# Altium PCB DummyLoadAddOn.PcbDoc
Units mil, origin at the board's own origin, x right, y up, seen from the top; angles counter-clockwise.
Board outline 2875 x 2200 mil, 4 copper layers (Top Layer, Layer2, Layer3, Bottom Layer), stack 64.6 mil thick; 31 components, 29 nets, 127 pads, 154 vias.
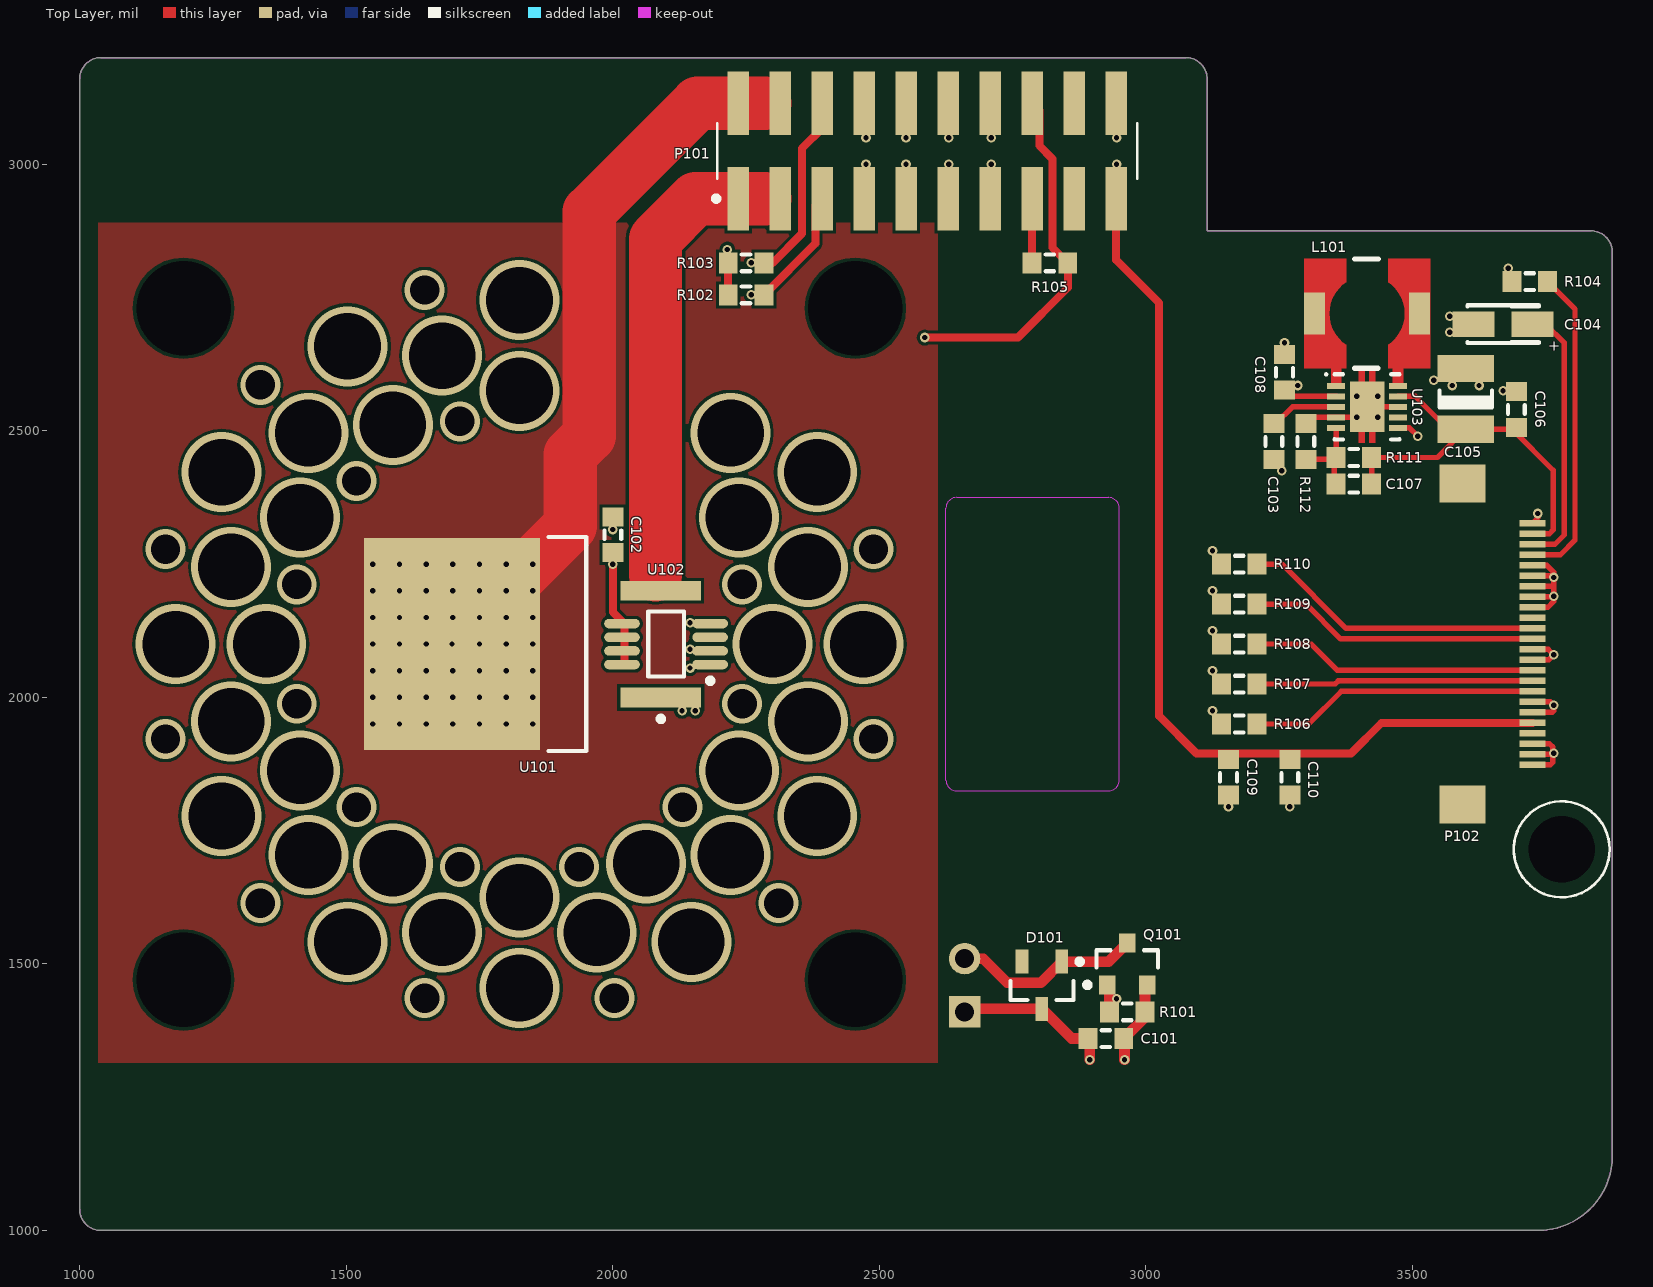
[diagram p0: Top Layer view]
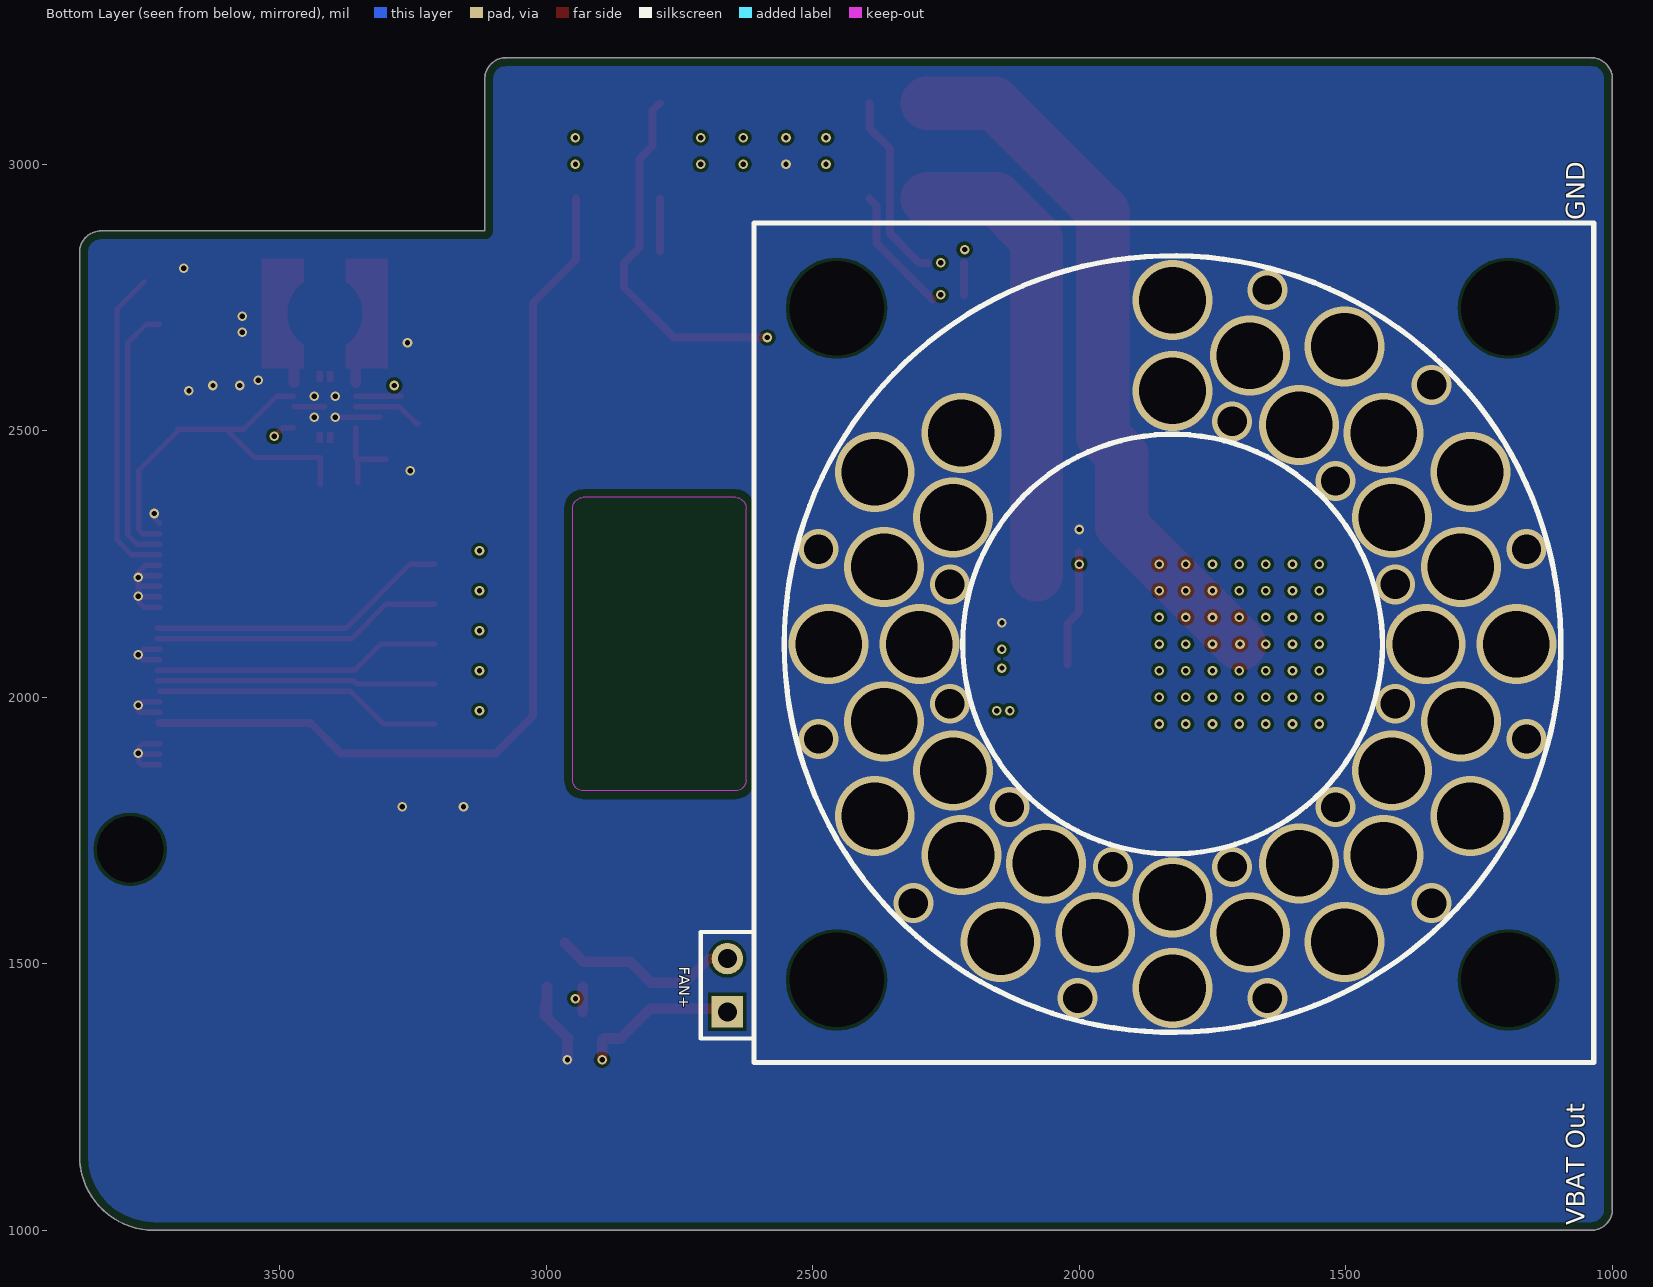
[diagram p1: Bottom Layer view, seen from below]
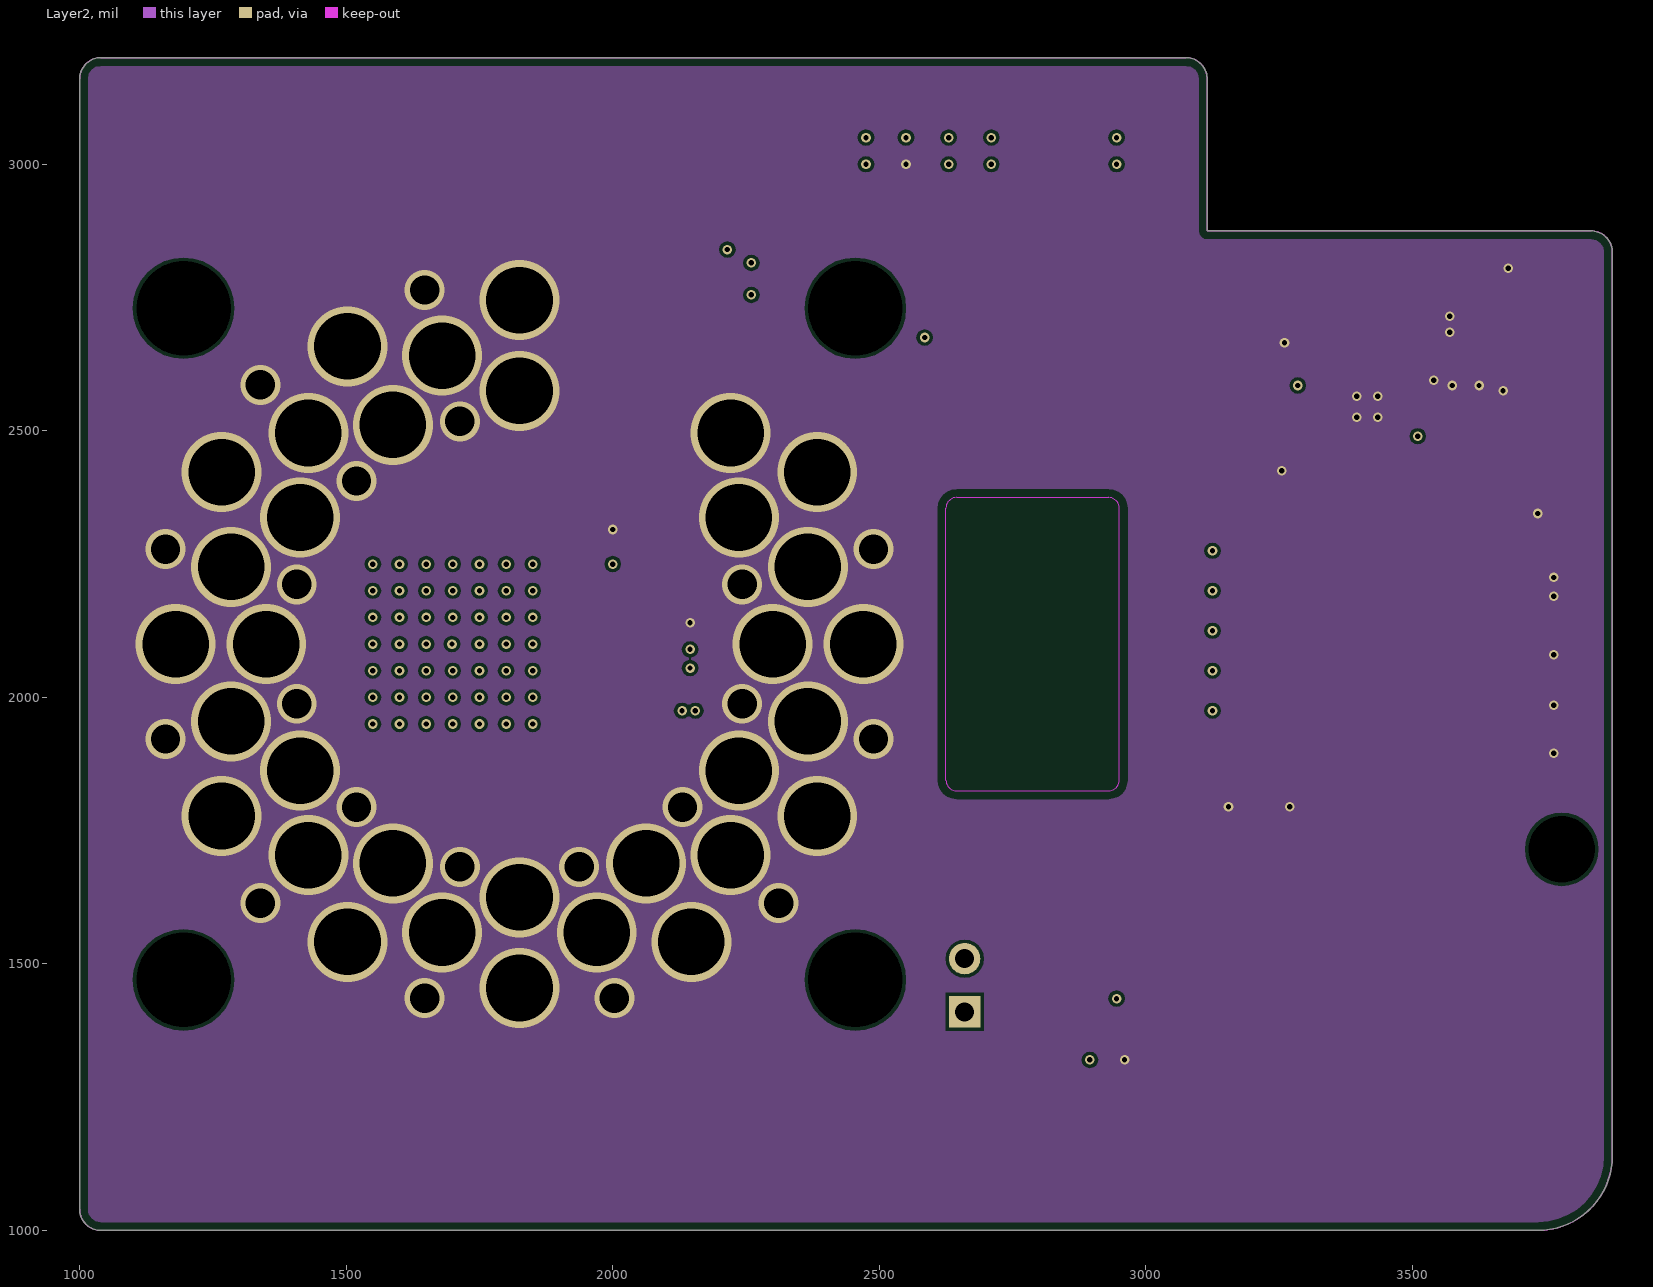
[diagram p2: Layer2]
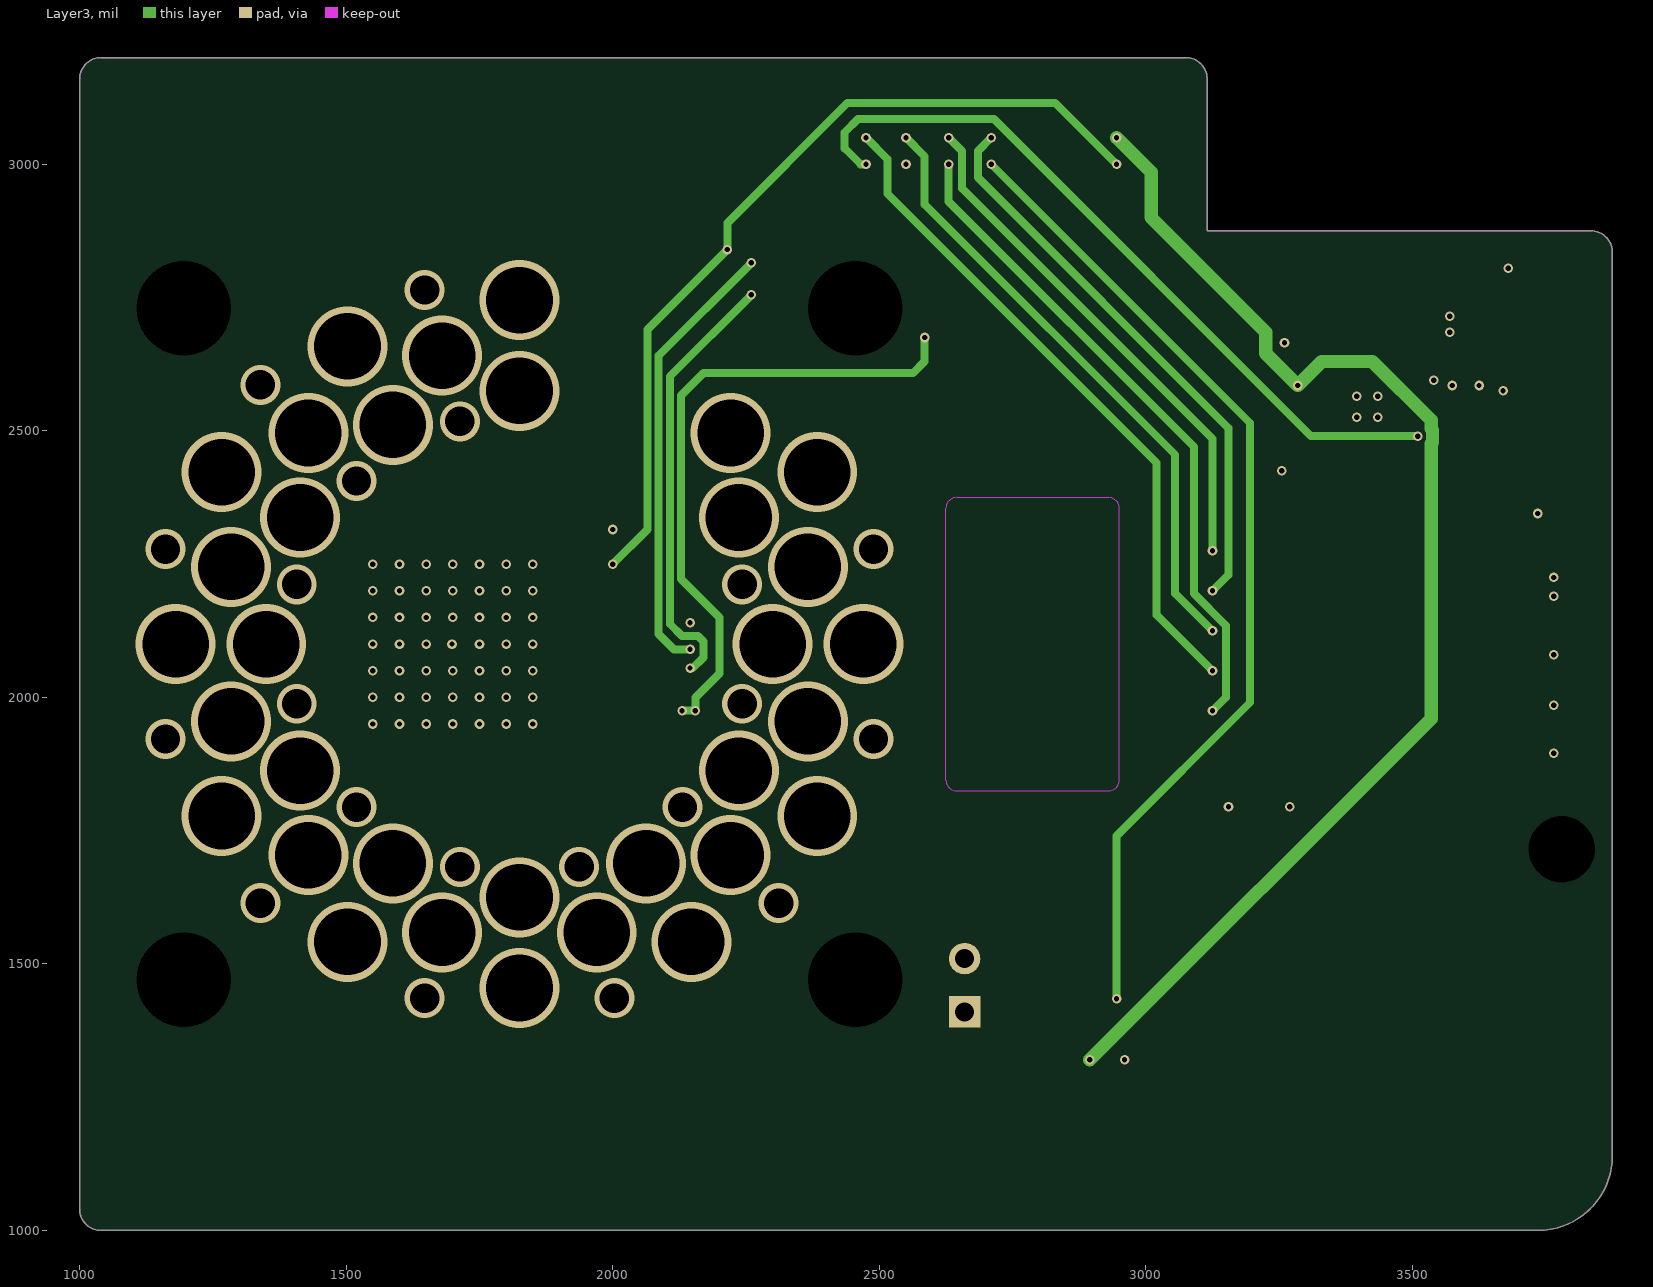
[diagram p3: Layer3]

## Layer stack, top to bottom
Top Solder: solder mask 0.4, Solder Resist, Dk 3.5
Top Layer: signal copper 1.4
Dielectric 1: core 6.7, FR-4, Dk 3.66
Layer2: signal copper 0.7
Dielectric 3: prepreg 47, Dk 3.66
Layer3: signal copper 0.7
Dielectric 2: core 6.7, Dk 3.66
Bottom Layer: signal copper 1.4
Bottom Solder: solder mask 0.4, Solder Resist, Dk 3.5

## Board outline
1000,1040 ccw(c1040,1040) 1040,1000 3735,1000 ccw(c3735,1140) 3875,1140 3875,2835 ccw(c3835,2835) 3835,2875 3115,2875 3115,3160 ccw(c3075,3160) 3075,3200 1040,3200 ccw(c1040,3160) 1000,3160

## Design rules (kind name [scope] priority, off if disabled: settings)
Clearance Clearance_1 [OnLayer('Keep-Out Layer')] p1: gap=15
Clearance [All] p2: gap=6
HoleSize [All] p1: absolutevalues=TRUE maxlimit=180 minlimit=10 maxpercent=80.000 minpercent=20.000
MinimumSolderMaskSliver [All] p1: minsoldermaskwidth=5.7
PasteMaskExpansion [All] p1: expansion=-1
PlaneConnect [All] p1: planeconnectstyle=Direct reliefexpansion=20 reliefentries=4 reliefconductorwidth=10 reliefairgap=10
PolygonConnect [All] p1: connectstyle=Direct reliefconductorwidth=10 reliefentries=4 polygonreliefangle="90 Angle" airgapwidth=10
RoomDefinition DummyLoadAddOn [InComponentClass('DummyLoadAddOn')] p1: confinementstyle=ConfineIn formatcopy=TRUE lockcomponents=FALSE outline 1000,1010 3890,1010 3890,3215 1000,3215
RoutingVias [All] p1: holewidth=13 width=18 viastyle="Through Hole" minholewidth=10 minwidth=18 maxholewidth=28 maxwidth=50
SilkToSolderMaskClearance [IsPad] p1: minsilkscreentomaskgap=2.8 clearancetoexposedcopper=TRUE
SolderMaskExpansion [All] p1: expansion=1
Width [All] p1: maxlimit=300 minlimit=6 preferedwidth=10
25 further rules are at their usual default settings.

## Components (designator, comment, footprint, x,y, rotation, side; value= is the part's Value field where it differs from the comment)
C101 "1608" RESC1608N 2925,1360 r180 top
C102 "1608" RESC1608N 2000,2305 r270 top
C103 "1608" RESC1608N 3240,2480 r90 top
C104 "T491A475K025AT" A_3216 3670,2700 r0 top
C105 "TMK325B7106KN-TR" CAPC3225N 3600,2560 r90 top
C106 "1608" RESC1608N 3695,2540 r270 top
C107 "1608" RESC1608N 3390,2400 r0 top
C108 "1608" RESC1608N 3260,2610 r270 top
C109 "1608" RESC1608N 3155,1850 r270 top
C110 "1608" RESC1608N 3270,1850 r270 top
D101 "Diode BAS16" SOT-23_N 2805,1460 r270 top
FAN+ "Header 2" HDR1X2 2660,1410 r90 bottom
L101 "Inductor" SRR4018 3415,2720 r90 top
P101 "TW-10-03-F-D-310-SM" "Samtec TW-SM 20-pin" 2590,3025 r90 top
P102 "FH12A-24S-0.5SH(55)" "MI050DXK-24-1 - duplicate" 3725,2100 r270 top
Q101 "NTR4501NT1G" ONSC-SOT-23-3-318-08_V 2965,1500 r90 top
R101 "1608" RESC1608N 2965,1410 r180 top
R102 "1608" RESC1608N 2250,2755 r180 top
R103 "1608" RESC1608N 2250,2815 r180 top
R104 "1608" RESC1608N 3720,2780 r180 top
R105 "1608" RESC1608N 2820,2815 r180 top
R106 "1608" RESC1608N 3175,1950 r180 top
R107 "1608" RESC1608N 3175,2025 r180 top
R108 "1608" RESC1608N 3175,2100 r180 top
R109 "1608" RESC1608N 3175,2175 r180 top
R110 "1608" RESC1608N 3175,2250 r180 top
R111 "1608" RESC1608N 3390,2450 r180 top
R112 "1608" RESC1608N 3300,2480 r90 top
U101 "BTS117TC" INF-PG-TO263-3-2_N 1850,2100 r180 top
U102 "LM75BDP" MUA08A_N 2100,2100 r180 top
U103 "TPS61080DRCR" TI-DRC10-2400X1650TP_V 3415,2545 r0 top

## Footprints (in the part's own frame and the unit in brackets; to place one, negate y for a bottom-side part, rotate by r counter-clockwise, add the part's x,y. Pads: shape width x height; smd on the part's side, far side on the other; paste and mask are expansions set on the pad)
A_3216 [mm] "Capacitor, SM Tantalum; Body 3.2 x 1.6 mm (LxW typ)"
  rect 2x1.2 smd: 1(1.4,0) 2(-1.4,0)
  silkscreen extent -1.7,-0.9 1.7,0.9, body extent -1.88,-1 1.88,1, height 1.9
CAPC3225N [mm] "Chip Capacitor, Body 3.2x2.5mm, IPC Medium Density"
  rect 1.3x2.7 smd: 1(-1.45,0) 2(1.45,0)
  silkscreen extent -0.4,-1.25 0.4,1.25, body extent -1.7,-1.35 1.7,1.35, height 1.35
HDR1X2 [mm] "Connector; Header; 2 Position"
  rect 1.5x1.5 hole 0.9: 1(0,0)
  round 1.5 hole 0.9: 2(2.54,0)
  silkscreen extent -1.27,-1.27 3.81,1.27
INF-PG-TO263-3-2_N [mm] "DPAK, 3-Leads, Body 10x9.25mm, Pitch 2.54mm, IPC Medium Density"
  rect 3.85x0.95 smd: 1(-6.1,2.54) 3(-6.1,-2.54)
  rect 8.4x10.1 smd: 2(3.85,0)
  silkscreen extent -6.23,-5.1 -0.75,5.1, body extent -2.55,-5.1 6.9,5.1, height 4.4
"MI050DXK-24-1 - duplicate" [mm] "24 pos FPC contact"
  rect 0.3x1.25 smd: 1(5.75,0) 2(5.25,0) 3(4.75,0) 4(4.25,0) 5(3.75,0) 6(3.25,0) 7(2.75,0) 8(2.25,0) 9(1.75,0) 10(1.25,0) 11(0.75,0) 12(0.25,0) 13(-0.25,0) 14(-0.75,0) 15(-1.25,0) 16(-1.75,0) 17(-2.25,0) 18(-2.75,0) 19(-3.25,0) 20(-3.75,0) 21(-4.25,0) 22(-4.75,0) 23(-5.25,0) 24(-5.75,0)
  rect 1.8x2.2 smd: MP1(7.65,-3.325) MP2(-7.65,-3.325)
MUA08A_N [mm] "TSOP, 8-Leads, Body 3x3mm, Pitch 0.65mm, IPC Medium Density"
  oval 1.7x0.45 smd: 1(-2.1,0.975) 2(-2.1,0.325) 3(-2.1,-0.325) 4(-2.1,-0.975) 5(2.1,-0.975) 6(2.1,-0.325) 7(2.1,0.325) 8(2.1,0.975)
  silkscreen extent -2.22,-1.55 0.85,1.87, body extent -1.55,-1.55 1.55,1.55, height 1.09
ONSC-SOT-23-3-318-08_V [mm] "SOT23, 3-Leads, Body 2.92x1.3mm, Pitch 0.95mm"
  rect 0.9x0.8 smd: 1(-1,0.95) 2(-1,-0.95) 3(1,0)
  silkscreen extent -1.12,-1.46 0.65,2.02, body extent -0.65,-1.46 0.65,1.46, height 1.11
RESC1608N [mm] "Chip Resistor, Body 1.6x0.8mm, IPC Medium Density"
  rect 0.9x1 smd: 1(-0.85,0) 2(0.85,0)
  silkscreen extent -0.2,-0.4 0.2,0.4, body extent -0.85,-0.48 0.85,0.48, height 0.6
"Samtec TW-SM 20-pin" [mm]
  rect 3.025x1.02 smd: 1(-2.272,9) 2(2.272,9) 3(-2.272,7) 4(2.272,7) 5(-2.272,5) 6(2.272,5) 7(-2.272,3) 8(2.272,3) 9(-2.272,1) 10(2.272,1) 11(-2.272,-1) 12(2.272,-1) 13(-2.272,-3) 14(2.272,-3) 15(-2.272,-5) 16(2.272,-5) 17(-2.272,-7) 18(2.272,-7) 19(-2.272,-9) 20(2.272,-9)
  silkscreen extent -2.4,-10 1.33,10.18, body extent -3.37,-10 3.37,10, height 11.89
SOT-23_N [mm] "SOT23, 3-Leads, Body 2.9x1.3mm, Pitch 0.95mm, Lead Span 2.5mm, IPC Medium Density"
  rect 1.15x0.6 smd: 1(-1.125,0.95) 2(-1.125,-0.95) 3(1.125,0)
  silkscreen extent -1.25,-1.5 0.7,1.93, body extent -0.7,-1.5 0.7,1.5, height 1.1
SRR4018 [mm] "Shielded SMD Power Inductors"
  rect 2x1 smd: 1(0,2.5) 2(0,-2.5)
  Top Layer region: 2.6,-1 2.6,-3 -2.6,-3 -2.6,-1 -1.5,-1 -1.498,-0.998 -0.849,-1.587 0,-1.8 0.849,-1.587 1.498,-0.998 1.498,-0.998 1.5,-1
  Top Layer region: -2.6,1 -2.6,3 2.6,3 2.6,1 1.5,1 1.498,0.998 0.849,1.587 0,1.8 -0.849,1.587 -1.498,0.998 -1.498,0.998 -1.5,1
  silkscreen extent -2.6,-0.53 2.6,0.6, body extent -2.5,-2.5 2.5,2.5, height 2
TI-DRC10-2400X1650TP_V [mm] "SON, 10-Leads, Body 3x3mm, Pitch 0.5mm, Thermal Pad 3x1.65mm"
  rect 0.85x0.28 smd: 1(-1.475,1) 2(-1.475,0.5) 3(-1.475,0) 4(-1.475,-0.5) 5(-1.475,-1) 6(1.475,-1) 7(1.475,-0.5) 8(1.475,0) 9(1.475,0.5) 10(1.475,1)
  rect 1.65x2.4 smd: 11(0,0)
  Top Layer region: 0.11,1.2 0.11,1.7 0.39,1.7 0.39,1.2
  Top Layer region: -0.11,-1.2 -0.11,-1.7 -0.39,-1.7 -0.39,-1.2
  Top Layer region: 0.11,-1.2 0.11,-1.7 0.39,-1.7 0.39,-1.2
  Top Layer region: -0.11,1.2 -0.11,1.7 -0.39,1.7 -0.39,1.2
  silkscreen extent -2,-1.55 1.55,1.6, body extent -1.5,-1.5 1.5,1.5, height 1

## Part data
C101 C102 C103 C106 C107 C108 C109 C110: library part "Cap Semi", "Capacitor (Semiconductor SIM Model)"
C104: library part T491A, "Solid Tantalum Chip Capacitor, Standard T491 Series - Industrial Grade"
C105: library part cap, "Capacitor"
D101: "Silicon Switching Diode for High-Speed Switching"
FAN+: "Header, 2-Pin"
P101: library part "Header 20", "Header, 20-Pin"
P102: library part "Header 24", "FPC 24-pin Display"
Q101: "Power MOSFET, 20 V, 3.2 A, Single N-Channel, 3-Pin SOT-23, Pb-Free, Tape and Reel"
R101 R102 R103 R104 R105 R106 R107 R108 R109 R110 R111 R112: library part "Res Semi", "Semiconductor Resistor"
U101: "Smart Low-Side Power Switch HITFET, 60 V VDS, 3.5 A ID, -40 to 150 degC, PG-TO263-3-2, Reel, Green"
U102: library part LM75BIMM-3/NOPB, "Digital Temperature Sensor and Thermal Watchdog with Two-Wire Interface, 8-pin Mini SOIC, Pb-Free"
U103: "27 V, 500 mA Switch, 1.2 MHz Boost Converter with Integrated Power Diode, 2.5 to 6 V, -40 to 85 degC, 10-pin SON (DRC10), Green (RoHS & no Sb/Br)"

## Free pads (board coordinates)
  round 0 hole 177.17: 0(1195,1470) 0(1195,2730) 0(2455,1470) 0(2455,2730)
  round 0 hole 125: 0(3780,1715)

## Via types
v1: diameter 18, hole 10, Top Layer to Bottom Layer, tented both sides, 101 vias
v2: diameter 150, hole 125, Top Layer to Bottom Layer, 33 vias
v3: diameter 75, hole 55, Top Layer to Bottom Layer, 20 vias

## Nets (pads, with @x,y where several pads share a name; then routed paths per layer and width w, separated by ;. In a path a pad name is that pad's centre, name@x,y a point inside that pad or via, vN(x,y) a via of type N, cw(c..) or ccw(c..) an arc to the next point about the centre after c; other vN are vias at no path point)
3V3: C102.2 C109.1 C110.1 P101.19 P102.5 R102.2 R103.2 U102.5 U102.6 U102.7 U102.8 | length 3636.2
  Top Layer w15: C102.2 v1(2000,2250) 2000,2160 2021.61,2138.39 2022.32,2138.39 U102.8@2022.32,2061.61 ; R102.2 R103.2 ; P101.19 2944.33,2820.67 3025,2740 3025,1965 3095,1895 3385,1895 3442.36,1952.36 P102.5
  Layer3 w15: v1(2000,2250) 2065,2315 2065,2690 v1(2215,2840) 2215,2890 2440,3115 2830,3115 v1(2945,3000)
5V: C101.2 C108.2 D101.3 FAN+.1 P101.20 U103.2 | length 2737.7
  Top Layer w10: C108.2@3271.85,2564.69 U103.2
  Top Layer w20: FAN+.1@2685.71,1415.71 D101.3 2860.71,1360 C101.2 ; v1(2895,1320) C101.2@2895,1356.54
  Layer3 w25: v1(2895,1320) 3535,1960 3535,2476.11 3537.5,2478.61 3537.5,2501.39 3535,2503.89 3535,2520 3425,2630 3330,2630 v1(3285,2585) 3225,2645 3225,2685 3010,2900 3010,2985 v1(2945,3050)
12V: C105.1 C106.2 C107.2 P102.23 R111.1 U103.9 | length 752.1
  Top Layer w10: C107.2 R111.1 3547.09,2450 C105.1 ; U103.9 3505.31,2564.69 3567.09,2502.91 C105.1 ; C106.2@3689.23,2500.77 3763.99,2426.01 3763.99,2313.99 3756.69,2306.69 P102.23 ; C106.2@3691.38,2502.91 C105.1
DISP12VENA: P101.7 U103.6 | length 1457.6
  Top Layer w10: U103.6 3494.37,2505.63 v1(3510,2490)
  Layer3 w15: v1(2475,3000) 2465,3000 2435,3030 2435,3060 2460,3085 2715,3085 3310,2490 v1(3510,2490)
DISPCD: P101.10 R108.2 | length 1163.2
  Layer3 w15: v1(2550,3050) 2585,3015 2585,2925 3055,2455 3055,2195 v1(3125,2125)
DISPCK: P101.14 R109.2 | length 1067.5
  Layer3 w15: v1(2710,3050) 2685,3025 2685,2975 3155,2505 3155,2230 v1(3125,2200)
DISPCS: P101.11 R106.2 | length 1250.7
  Layer3 w15: v1(2630,3000) 2630,2930 3090,2470 3090,2195 3150,2135 3150,2000 v1(3125,1975)
DISPRST: P101.8 R107.2 | length 1269.2
  Layer3 w15: v1(2475,3050) 2515,3010 2515,2945 3020,2440 3020,2155 v1(3125,2050)
DISPSI: P101.12 R110.2 | length 980
  Layer3 w15: v1(2630,3050) 2655,3025 2655,2955 3125,2485 v1(3125,2275)
DUMMYLOADGATE: P101.15 R105.2 | length 98.9
  Top Layer w15: 2786.85,2836.61 P101.15
DUMMYLOADNEG: P101.1 P101.3 U101.3 | length 866.3
  Top Layer w100: 2080,2230 2080,2860 2155.53,2935.53 P101.1 2285,2935.53
FANENA: P101.13 Q101.1 R101.2 | length 1916.1
  Top Layer w20: R101.2 Q101.1@2931.54,1456.69
  Layer3 w15: v1(2710,3000) 3195,2515 3195,1990 2945,1740 v1(2945,1435)
GND: C101.1 C102.1 C103.1 C104.2 C105.2 C106.1 C108.1 C109.2 C110.2 P101.9 P102.1 P102.2 P102.3 P102.6 P102.7 P102.11 P102.12 P102.16 P102.17 P102.18 P102.19 P102.20 P102.24 Q101.2 R101.1 R104.2 R112.2 U102.4 U103.4 U103.8 U103.11 | length 918
  Top Layer w10: R112.2@3311.85,2525.32 U103.4 v1(3395.31,2525.32) ; U103.11 U103.8 ; P102.1 3758.62,1873.62 3763.31,1878.31 v1@3763.31,1893.31 ; P102.2 v1@3763.31,1893.31 ; P102.3 3757.01,1912.99 3763.31,1906.69 v1@3763.31,1893.31 ; P102.6 3762.05,1972.05 3765,1975 v1(3765,1985) 3758.27,1991.73 P102.7 ; P102.11 3755.47,2070.47 v1(3765,2080) 3754.84,2090.16 P102.12 ; P102.16 3753.9,2168.9 3765,2180 v1(3765,2190) v1(3765,2225) 3765,2235 3752.36,2247.64 P102.20 ; P102.17 v1@3763.58,2188.58 ; P102.18 3764.23,2208.27 ; P102.19 v1@3762.05,2227.95 ; P102.24 3735,2336.38 v1(3735,2345)
  Top Layer w20: C101.1 3002.4,1403.94 R101.1@3002.4,1420.63 ; v1(2960,1320) C101.1@2960,1358.46 ; R101.1 Q101.2@2998.46,1456.69
  other v1: 3155,1795 3270,1795 3765,1895 2145,2140 2000,2315 3255,2425 3434.68,2525.32 3395.31,2564.69 3434.68,2564.69 3670,2575 3575,2585 3625,2585 3540,2595 3260,2665 3570,2685 3570,2715 3680,2805 2550,3000
  other v2: 1825,1455 1502.5,1541.41 2147.5,1541.41 1680.06,1559.08 1969.94,1559.08 1825,1625 1587.5,1688.64 2062.5,1688.64 1429.02,1704.02 2220.98,1704.02 1266.41,1777.5 2383.59,1777.5 1413.64,1862.5 2236.36,1862.5 1284.08,1955.06 2365.92,1955.06 1180,2100 1350,2100 2300,2100 2470,2100 1284.08,2244.94 2365.92,2244.94 1413.64,2337.5 2236.36,2337.5 1266.41,2422.5 2383.59,2422.5 1429.02,2495.98 2220.98,2495.98 1587.5,2511.36 1825,2575 1680.06,2640.92 1502.5,2658.59 1825,2745
  other v3: 1647.06,1435.93 2002.94,1435.93 1338.86,1613.86 2311.14,1613.86 1713.06,1682.24 1936.94,1682.24 1519.18,1794.18 2130.82,1794.18 1160.93,1922.06 2489.07,1922.06 1407.24,1988.06 2242.76,1988.06 1407.24,2211.94 2242.76,2211.94 1160.93,2277.94 2489.07,2277.94 1519.18,2405.82 1713.06,2517.76 1338.86,2586.14 1647.06,2764.07
NetC103_2: C103.2 U103.3 | length 130
  Top Layer w10: C103.2 3243.46,2513.46 3275,2545 U103.3
NetC104_1: C104.1 P102.22 | length 521.6
  Top Layer w10: P102.22 3767.01,2287.01 ; C104.1 3750,2700 3785,2665 3785,2305 3767.01,2287.01 ; 3781,2301 3767.01,2287.01
NetC107_1: C107.1 R111.2 R112.1 U103.5 | length 151.4
  Top Layer w10: R112.1 3353.07,2446.54 C107.1@3353.07,2403.46 ; R111.2@3356.93,2450.39 U103.5
NetD101_1: D101.1 FAN+.2 Q101.3 | length 334.4
  Top Layer w20: FAN+.2@2680,1510 2695,1510 2740,1465 2803.11,1465 D101.1 2929.92,1504.29 Q101.3
NetL101_1: L101.1 U103.1 | length 33.1
  Top Layer w20: 3356.93,2590 3356.93,2623.07
NetL101_2: L101.2 U103.10 | length 33.1
  Top Layer w20: 3473.07,2590 3473.07,2623.07
NetP102_8: P102.8 R106.1 | length 542
  Top Layer w10: R106.1 3305,1950 3366.42,2011.42 P102.8
NetP102_9: P102.9 R107.1 | length 524.1
  Top Layer w10: R107.1 3355,2025 3361.1,2031.1 P102.9@3730,2031.1
NetP102_10: P102.10 R108.1 | length 541.9
  Top Layer w10: R108.1 3310,2100 3359.21,2050.79 P102.10@3730,2050.79
NetP102_13: P102.13 R109.1 | length 548.5
  Top Layer w10: R109.1 3300,2175 3365.16,2109.84 P102.13@3730,2109.84
NetP102_14: P102.14 R110.1 | length 571.4
  Top Layer w10: R110.1 3255,2250 3375.47,2129.53 P102.14@3730,2129.53
NetP102_21: P102.21 R104.1 | length 597.8
  Top Layer w10: P102.21 3777.32,2267.32 3805,2295 3805,2728.46 R104.1
SCL: P101.6 R103.1 U102.2 | length 1193.7
  Top Layer w15: R103.1 2300,2815 2355,2870 2355,3030 2393.15,3068.15 P101.6
  Layer3 w15: v1(2145,2090) 2115,2090 2086,2119 2086,2641 v1(2260,2815)
SDA: P101.5 R102.1 U102.1 | length 1058.3
  Top Layer w15: R102.1@2275,2746.54 R102.1 2380,2851.54 2380,2922.38 P101.5
  Layer3 w15: v1(2145,2055) 2150,2055 2170,2075 2170,2105 2160,2115 2130,2115 2107,2138 2107,2602 v1(2260,2755)
SPAREANA: P101.16 R105.1 U101.1 | length 1873.8
  Top Layer w15: v1(2585,2675) 2760,2675 2853.46,2768.46 R105.1 2825,2843.46 2825,3010 2800,3035 2800,3101.32 P101.16
  Layer3 w15: v1(2130,1975) v1(2155,1975) 2155,2000 2200,2045 2200,2150 2128,2222 2128,2566.07 2170.39,2608.46 2563.46,2608.46 2585,2630 v1(2585,2675)
VBATOUT: P101.2 P101.4 U101.2 | length 1331
  Top Layer w100: v1(1698.43,2100) 1920,2321.57 1920,2455 1956,2491 1956,2911 2159.47,3114.47 P101.2 2285,3114.47
  other v1: 1550,1950 1600,1950 1650,1950 1700,1950 1750,1950 1800,1950 1850,1950 1550,2000 1600,2000 1650,2000 1700,2000 1750,2000 1800,2000 1850,2000 1550,2050 1600,2050 1650,2050 1700,2050 1750,2050 1800,2050 1850,2050 1550,2100 1600,2100 1650,2100 1750,2100 1800,2100 1850,2100 1550,2150 1600,2150 1650,2150 1700,2150 1750,2150 1800,2150 1850,2150 1550,2200 1600,2200 1650,2200 1700,2200 1750,2200 1800,2200 1850,2200 1550,2250 1600,2250 1650,2250 1700,2250 1750,2250 1800,2250 1850,2250
pads on no net: D101.2 P101.17 P101.18 P102.4 P102.15 P102.MP1 P102.MP2 U102.3 U103.7

## Polygon pours and split planes (outlines as drawn)
GND on Layer2 "gnd" (solid, remove dead copper, pour order 5): 1000,1000 3875,1000 3875,3200 1000,3200
VBATOUT on Top Layer "vbat" (solid, remove dead copper, pour order 6): 1035,2890 2610,2890 2610,1315 1035,1315
GND on Bottom Layer "botgnd" (solid, remove dead copper, pour order 8): 1000,3200 3875,3200 3875,1000 1000,1000
GND on Bottom Layer "botgnd" (solid, remove dead copper, pour order 7): 1000,990 1000,1315 3880,1315 3880,1000

## Keep-outs
Keep-Out Layer:
  lines w1: 1000,1040 ccw(c1040,1040) 1040,1000 3735,1000 ccw(c3735,1140) 3875,1140 3875,2835 ccw(c3835,2835) 3835,2875 3115,2875 3115,3160 ccw(c3075,3160) 3075,3200 1040,3200 ccw(c1040,3160) 1000,3160 1000,1040 ; 2625,1845 ccw(c2645,1845) 2645,1825 2930,1825 ccw(c2930,1845) 2950,1845 2950,2355 ccw(c2930,2355) 2930,2375 2645,2375 ccw(c2645,2355) 2625,2355 2625,1845
  text "CUTOUT" at 2745,2355 h90.55 r270

## Silkscreen, mask and mechanical layers (free items; w line width, h text height)
Top Overlay:
  circle w5: c3780,1715 r90
  text "+" at 3755,2650 h20
Bottom Overlay:
  circle w10: c1825,2100 r728.35
  circle w10: c1825,2100 r393.7
  lines w10: 1035,1315 2610,1315 2610,2890 1035,2890 1035,1315
  text "GND" at 1040,2895 h60 r270
  text "VBAT Out" at 1040,1010 h60 r270
Top Solder:
  text "werner.johansson@sonymobile.com" at 2280,1120 h50
Bottom Solder:
  text "Dummy Load/Display Add-on for" at 3070,1165 h100
  text "Sony Debug Board (CDB Assist) v3" at 3135,1060 h100
Mechanical 1:
  lines w5: 2775,1275 3840,1275 3840,2925 2775,2925 2775,1275
Mechanical 14:
  lines w50: 2650,1850 2925,1850 2925,2350 2650,2350 2650,1850
  lines w100: 1040,3250 ccw(c1040,3160) 950,3160 950,1040 ccw(c1040,1040) 1040,950 3735,950 ccw(c3735,1140) 3925,1140 3925,2835 ccw(c3835,2835) 3835,2925 3165,2925 3165,3160 ccw(c3075,3160) 3075,3250
  text "CUTOUT" at 2760,2300 h70 r270